# EAGLE board P32 Main (EAGLE 5.06)
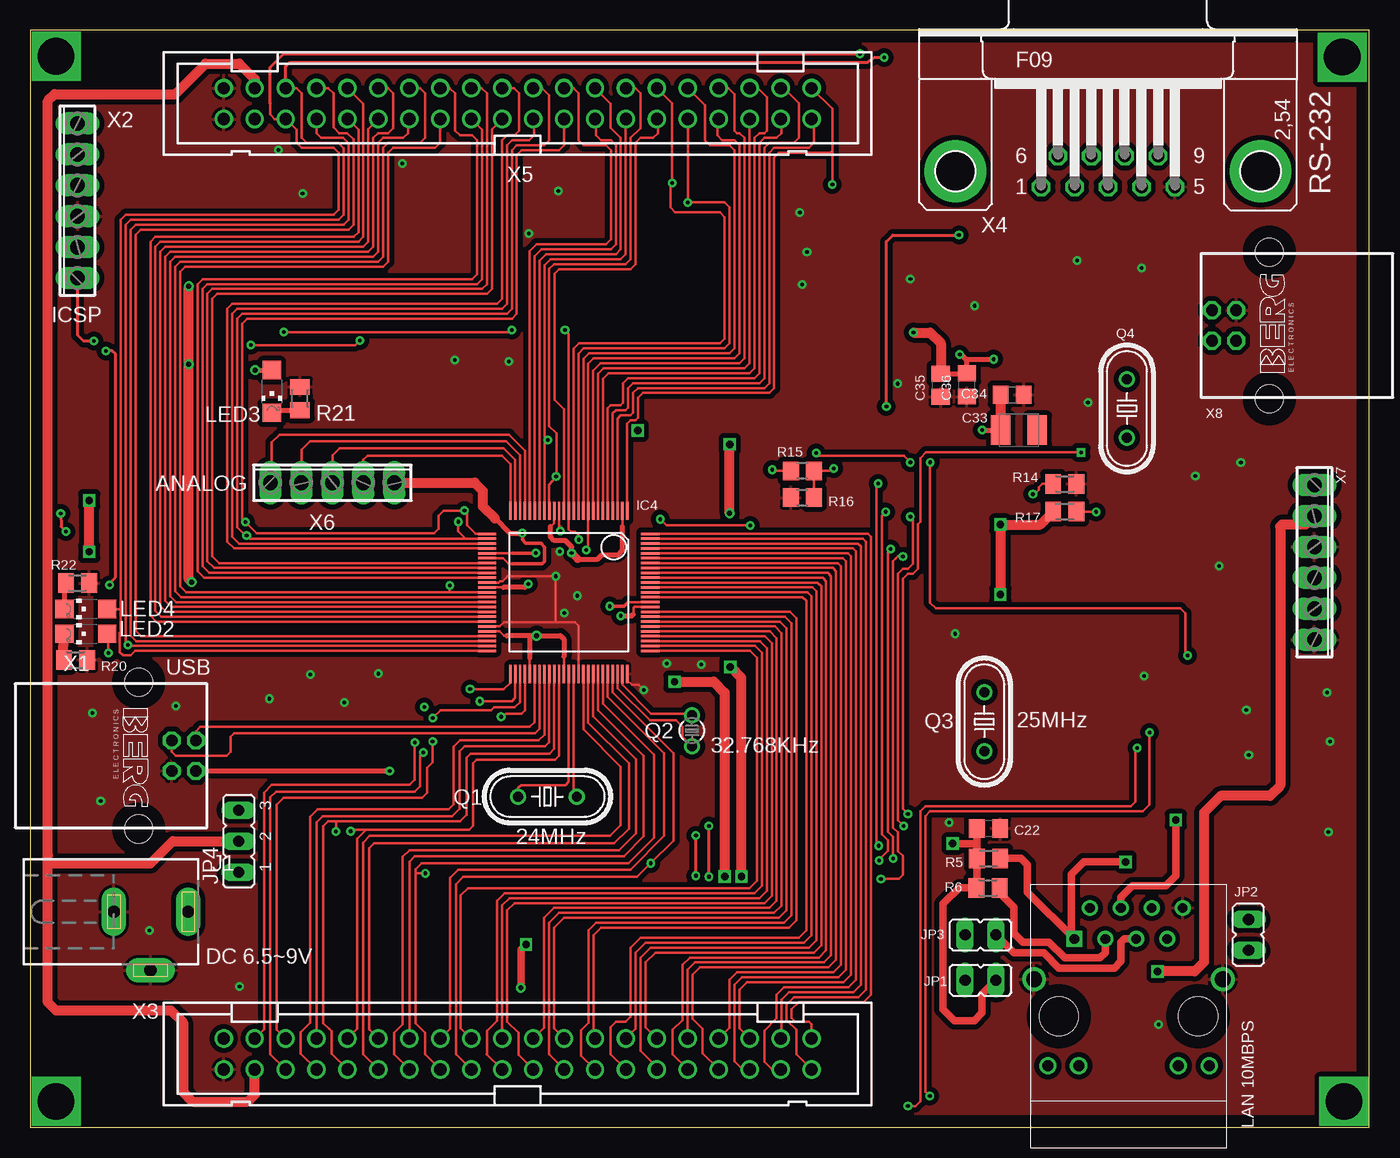
[diagram p0: board, top side]
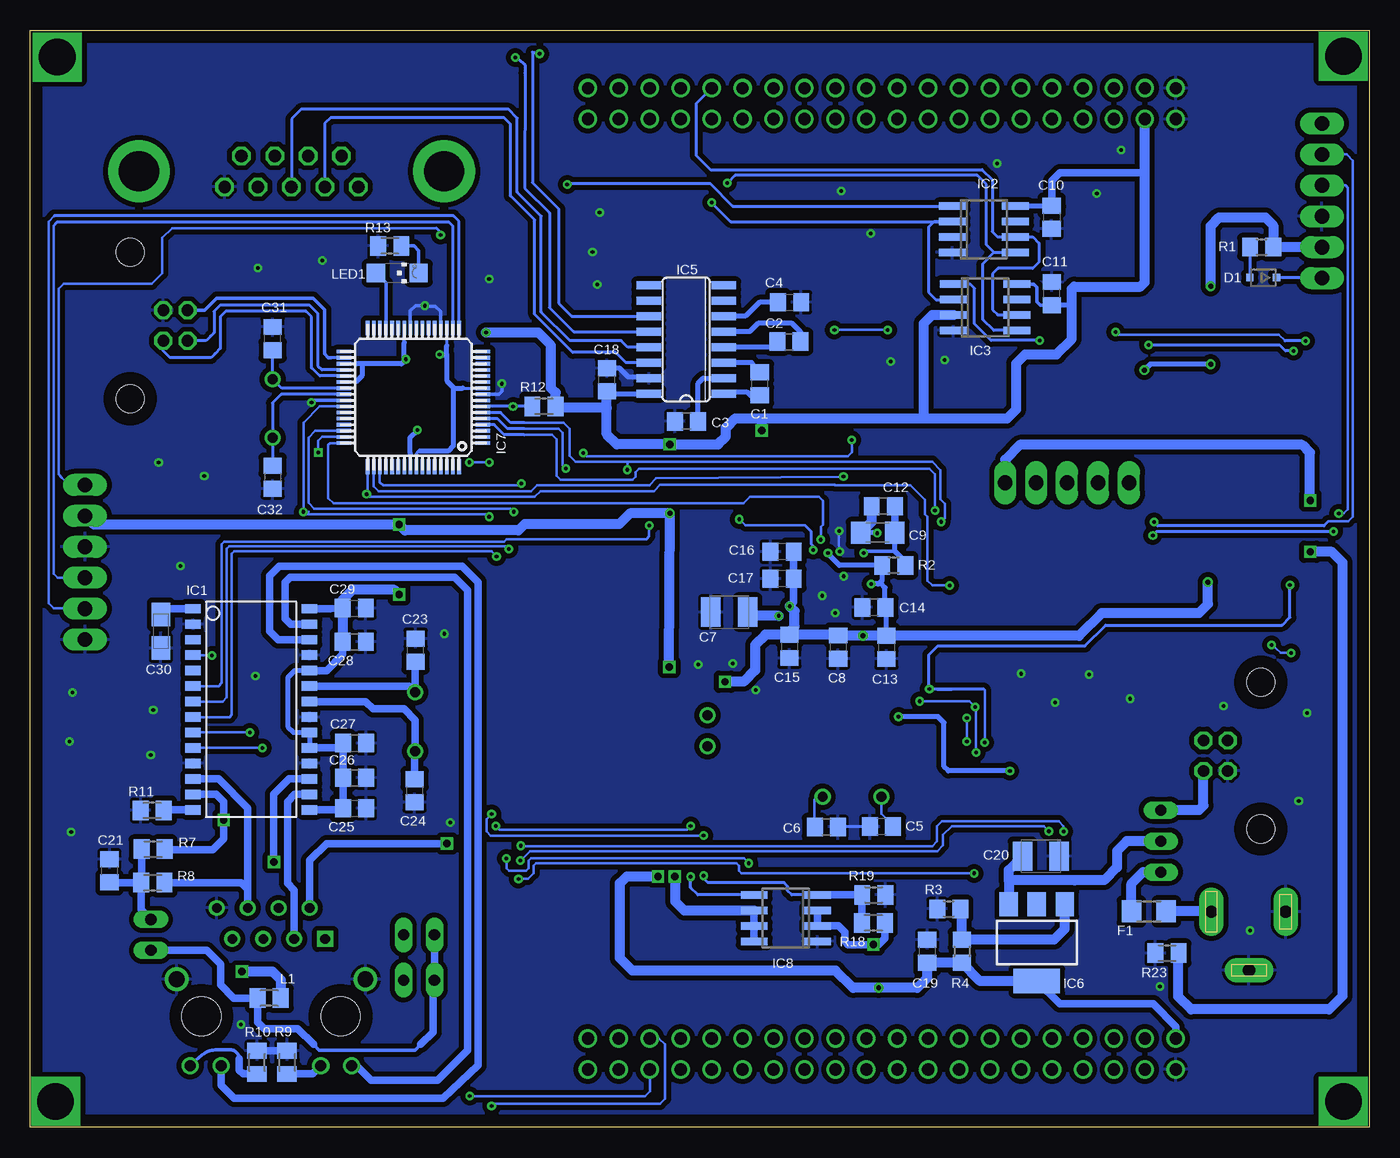
[diagram p1: board, bottom side, seen from below]

Size 109.9 x 90 mm. Coordinates in mm from the lower left corner, seen from the top.
Outline: 0,0 109.9,0 109.9,90 0,90 0,0
Copper layers (1*16): Top 0.035mm / dielectric 1.5mm / Bottom 0.035mm
Design rules "default *": minimum track width 7mil, minimum drill 0.3mm, track to track 7mil, track to pad 7mil, pad to pad 7mil, via to via 7mil, smd to smd 7mil, copper to edge 40mil, drill to drill 8mil, minimum pad ring 10mil, minimum via ring 8mil, stop-mask expansion 4mil, vias tented up to drill 0mil, thermal gap 10mil

## Footprints (pad centres in the part's own frame; a part is rotated, then mirrored left to right if it is on the bottom)
C0805 = smd 1.3 x 1.5: 1 -0.95,0; 2 0.95,0
SMC_B = smd 1.6 x 2.4: + -1.5,0; - 1.5,0
C1206 = smd 1.6 x 1.8: 1 -1.4,0; 2 1.4,0
A/3216-18R = smd 1.95 x 1.5: + 1.375,0; - -1.375,0
SOD323-R = smd 0.6 x 0.6: A 1.1,0; C -1.1,0
R1206 = smd 1.6 x 1.803: 1 -1.422,0; 2 1.422,0
SO28W = smd 0.762 x 1.27: 1 -7.62,-4.78; 2 -6.35,-4.78; 3 -5.08,-4.78; 4 -3.81,-4.78; 5 -2.54,-4.78; 6 -1.27,-4.78; 7 0,-4.78; 8 1.27,-4.78; 9 2.54,-4.78; 10 3.81,-4.78; 11 5.08,-4.78; 12 6.35,-4.78; 13 7.62,-4.78; 14 8.89,-4.78; 15 8.89,4.78; 16 7.62,4.78; 17 6.35,4.78; 18 5.08,4.78; 19 3.81,4.78; 20 2.54,4.78; 21 1.27,4.78; 22 0,4.78; 23 -1.27,4.78; 24 -2.54,4.78; 25 -3.81,4.78; 26 -5.08,4.78; 27 -6.35,4.78; 28 -7.62,4.78
SO-08 = smd 0.6 x 2.2: 1 -1.905,-2.6; 2 -0.635,-2.6; 3 0.635,-2.6; 4 1.905,-2.6; 5 1.905,2.6; 6 0.635,2.6; 7 -0.635,2.6; 8 -1.905,2.6
UBW32_TQFP100 = smd 0.2 x 1.5: 1 -4.8,-6.7; 2 -4.4,-6.7; 3 -4,-6.7; 4 -3.6,-6.7; 5 -3.2,-6.7; 6 -2.8,-6.7; 7 -2.4,-6.7; 8 -2,-6.7; 9 -1.6,-6.7; 10 -1.2,-6.7; 11 -0.8,-6.7; 12 -0.4,-6.7; 13 0,-6.7; 14 0.4,-6.7; 15 0.8,-6.7; 16 1.2,-6.7; 17 1.6,-6.7; 18 2,-6.7; 19 2.4,-6.7; 20 2.8,-6.7; 21 3.2,-6.7; 22 3.6,-6.7; 23 4,-6.7; 24 4.4,-6.7; 25 4.8,-6.7; 51 4.8,6.7; 52 4.4,6.7; 53 4,6.7; 54 3.6,6.7; 55 3.2,6.7; 56 2.8,6.7; 57 2.4,6.7; 58 2,6.7; 59 1.6,6.7; 60 1.2,6.7; 61 0.8,6.7; 62 0.4,6.7; 63 0,6.7; 64 -0.4,6.7; 65 -0.8,6.7; 66 -1.2,6.7; 67 -1.6,6.7; 68 -2,6.7; 69 -2.4,6.7; 70 -2.8,6.7; 71 -3.2,6.7; 72 -3.6,6.7; 73 -4,6.7; 74 -4.4,6.7; 75 -4.8,6.7 | smd 1.5 x 0.2: 26 6.7,-4.8; 27 6.7,-4.4; 28 6.7,-4; 29 6.7,-3.6; 30 6.7,-3.2; 31 6.7,-2.8; 32 6.7,-2.4; 33 6.7,-2; 34 6.7,-1.6; 35 6.7,-1.2; 36 6.7,-0.8; 37 6.7,-0.4; 38 6.7,0; 39 6.7,0.4; 40 6.7,0.8; 41 6.7,1.2; 42 6.7,1.6; 43 6.7,2; 44 6.7,2.4; 45 6.7,2.8; 46 6.7,3.2; 47 6.7,3.6; 48 6.7,4; 49 6.7,4.4; 50 6.7,4.8; 76 -6.7,4.8; 77 -6.7,4.4; 78 -6.7,4; 79 -6.7,3.6; 80 -6.7,3.2; 81 -6.7,2.8; 82 -6.7,2.4; 83 -6.7,2; 84 -6.7,1.6; 85 -6.7,1.2; 86 -6.7,0.8; 87 -6.7,0.4; 88 -6.7,0; 89 -6.7,-0.4; 90 -6.7,-0.8; 91 -6.7,-1.2; 92 -6.7,-1.6; 93 -6.7,-2; 94 -6.7,-2.4; 95 -6.7,-2.8; 96 -6.7,-3.2; 97 -6.7,-3.6; 98 -6.7,-4; 99 -6.7,-4.4; 100 -6.7,-4.8
SO16 = smd 0.66 x 2.032: 1 -4.445,-3.073; 2 -3.175,-3.073; 3 -1.905,-3.073; 4 -0.635,-3.073; 5 0.635,-3.073; 6 1.905,-3.073; 7 3.175,-3.073; 8 4.445,-3.073; 9 4.445,3.073; 10 3.175,3.073; 11 1.905,3.073; 12 0.635,3.073; 13 -0.635,3.073; 14 -1.905,3.073; 15 -3.175,3.073; 16 -4.445,3.073
SOT223 = smd 1.5 x 2: 1 -2.3,-3.15; 2 0,-3.15; 3 2.3,-3.15 | smd 3.8 x 2: 4 0,3.15
TQFP64-10X10 = smd 1.2 x 0.3: 1 -5.7,3.75; 2 -5.7,3.25; 3 -5.7,2.75; 4 -5.7,2.25; 5 -5.7,1.75; 6 -5.7,1.25; 7 -5.7,0.75; 8 -5.7,0.25; 9 -5.7,-0.25; 10 -5.7,-0.75; 11 -5.7,-1.25; 12 -5.7,-1.75; 13 -5.7,-2.25; 14 -5.7,-2.75; 15 -5.7,-3.25; 16 -5.7,-3.75; 33 5.7,-3.75; 34 5.7,-3.25; 35 5.7,-2.75; 36 5.7,-2.25; 37 5.7,-1.75; 38 5.7,-1.25; 39 5.7,-0.75; 40 5.7,-0.25; 41 5.7,0.25; 42 5.7,0.75; 43 5.7,1.25; 44 5.7,1.75; 45 5.7,2.25; 46 5.7,2.75; 47 5.7,3.25; 48 5.7,3.75 | smd 0.3 x 1.2: 17 -3.75,-5.7; 18 -3.25,-5.7; 19 -2.75,-5.7; 20 -2.25,-5.7; 21 -1.75,-5.7; 22 -1.25,-5.7; 23 -0.75,-5.7; 24 -0.25,-5.7; 25 0.25,-5.7; 26 0.75,-5.7; 27 1.25,-5.7; 28 1.75,-5.7; 29 2.25,-5.7; 30 2.75,-5.7; 31 3.25,-5.7; 32 3.75,-5.7; 49 3.75,5.7; 50 3.25,5.7; 51 2.75,5.7; 52 2.25,5.7; 53 1.75,5.7; 54 1.25,5.7; 55 0.75,5.7; 56 0.25,5.7; 57 -0.25,5.7; 58 -0.75,5.7; 59 -1.25,5.7; 60 -1.75,5.7; 61 -2.25,5.7; 62 -2.75,5.7; 63 -3.25,5.7; 64 -3.75,5.7
DCJ0202 = drill 1 pad 2 long: 1 0,3.1; 2 4.8,0; 3 0,-3
JP1 = drill 0.914 long: 1 0,-1.27; 2 0,1.27
JP2 = drill 0.914 long: 1 -2.54,0; 2 0,0; 3 2.54,0
M0805 = smd 1.3 x 1.6: 1 -0.95,0; 2 0.95,0
CHIPLED_1206 = smd 1.5 x 1.5: A 0,-1.75; C 0,1.75
HC49/S = drill 0.813 round: 1 -2.413,0; 2 2.413,0
TC26V = drill 0.813 round: 1 -1.27,0; 2 1.27,0
R0805 = smd 1.3 x 1.5: 1 -0.95,0; 2 0.95,0
PN61729 = drill 0.95 octagon: 1 1.25,4.71; 2 -1.25,4.71; 3 -1.25,2.71; 4 1.25,2.71 | hole 2.3: -6.02,0; 6.02,0
6POL254 = drill 1.2 pad 1.778 long: 1 -6.35,0; 2 -3.81,0; 3 -1.27,0; 4 1.27,0; 5 3.81,0; 6 6.35,0
PAK100/2500-40 = drill 1 pad 1.422 round: 1 -24.13,-1.27; 2 -24.13,1.27; 3 -21.59,-1.27; 4 -21.59,1.27; 5 -19.05,-1.27; 6 -19.05,1.27; 7 -16.51,-1.27; 8 -16.51,1.27; 9 -13.97,-1.27; 10 -13.97,1.27; 11 -11.43,-1.27; 12 -11.43,1.27; 13 -8.89,-1.27; 14 -8.89,1.27; 15 -6.35,-1.27; 16 -6.35,1.27; 17 -3.81,-1.27; 18 -3.81,1.27; 19 -1.27,-1.27; 20 -1.27,1.27; 21 1.27,-1.27; 22 1.27,1.27; 23 3.81,-1.27; 24 3.81,1.27; 25 6.35,-1.27; 26 6.35,1.27; 27 8.89,-1.27; 28 8.89,1.27; 29 11.43,-1.27; 30 11.43,1.27; 31 13.97,-1.27; 32 13.97,1.27; 33 16.51,-1.27; 34 16.51,1.27; 35 19.05,-1.27; 36 19.05,1.27; 37 21.59,-1.27; 38 21.59,1.27; 39 24.13,-1.27; 40 24.13,1.27
F09HP = drill 1.016 octagon: 1 -5.486,-1.27; 2 -2.743,-1.27; 3 0,-1.27; 4 2.743,-1.27; 5 5.486,-1.27; 6 -4.115,1.27; 7 -1.372,1.27; 8 1.372,1.27; 9 4.115,1.27 | drill 3.302 pad 5.08 round: G1 -12.522,0; G2 12.522,0
5POL254 = drill 1.2 long: 1 -5.08,0; 2 -2.54,0; 3 0,0; 4 2.54,0; 5 5.08,0
MAGJACK = drill 0.8 square: 1 -4.445,6.35 | drill 0.8 round: 2 -3.175,8.89; 3 -1.905,6.35; 4 -0.635,8.89; 5 0.635,6.35; 6 1.905,8.89; 7 3.175,6.35; 8 4.445,8.89 | drill 1.3 round: GND1 -7.747,3.048; GND2 7.747,3.048 | drill 0.9 round: LED1.1 -6.629,-4.064; LED1.2 -4.089,-4.064; LED2.1 4.089,-4.064; LED2.2 6.629,-4.064 | hole 3.2: -5.715,0; 5.715,0

## Placement (x,y rotation side)
C1  0.1uF  [C0805]  50.01,61.01 90 bottom
C2  0.1uF  [C0805]  47.62,64.47 0 bottom
C3  0.1uF  [C0805]  56.03,57.91 180 bottom
C4  0.1uF  [C0805]  47.57,67.69 0 bottom
C5  18pF  [C0805]  40.03,24.66 180 bottom
C6  18pF  [C0805]  44.55,24.64 0 bottom
C7  10uF  [SMC_B]  52.53,42.27 180 bottom
C8  0.1uF  [C0805]  43.59,39.4 270 bottom
C9  47uF  [C1206]  40.34,48.77 180 bottom
C10  0.1uF  [C0805]  26.06,74.68 270 bottom
C11  0.1uF  [C0805]  26.04,68.4 90 bottom
C12  0.01uF  [C0805]  39.88,50.95 180 bottom
C13  1uF  [C0805]  39.62,39.37 270 bottom
C14  0.01uF  [C0805]  40.64,42.65 180 bottom
C15  1uF  [C0805]  47.57,39.45 270 bottom
C16  0.1uF  [C0805]  48.18,47.22 180 bottom
C17  0.01uF  [C0805]  48.18,45.01 180 bottom
C18  0.1uF  [C0805]  62.56,61.34 90 bottom
C19  1uF  [C0805]  36.27,14.43 90 bottom
C20  10uF  [SMC_B]  26.95,22.23 0 bottom
C21  0.1uF  [C0805]  103.4,21.03 90 bottom
C22  0.1uF  [C0805]  78.66,24.51 0 top
C23  18pF  [C0805]  78.28,39.14 90 bottom
C24  18pF  [C0805]  78.36,27.61 270 bottom
C25  0.1uF  [C0805]  83.29,26.16 0 bottom
C26  0.1uF  [C0805]  83.29,28.68 0 bottom
C27  0.1uF  [C0805]  83.29,31.52 0 bottom
C28  0.1uF  [C0805]  83.31,39.83 0 bottom
C29  0.1uF  [C0805]  83.31,42.6 0 bottom
C30  10uF  [A/3216-18R]  99.19,40.69 90 bottom
C31  18pF  [C0805]  90.02,64.72 90 bottom
C32  18pF  [C0805]  90.02,53.34 270 bottom
C33  10uF  [SMC_B]  81.15,57.2 0 top
C34  0.1uF  [C0805]  80.59,60.1 0 top
C35  0.1uF  [C0805]  74.73,60.88 90 top
C36  0.1uF  [C0805]  76.89,60.91 90 top
D1  1N4148 SOD323  [SOD323-R]  8.69,69.72 180 bottom
F1  MF-NSMF200 Fuse  [R1206]  18.08,17.7 180 bottom
IC1  ENC28J60SO  [SO28W]  91.77,34.92 270 bottom
IC2  23A256  [SO-08]  31.62,73.69 270 bottom
IC3  25AA256  [SO-08]  31.52,67.28 270 bottom
IC4  PIC32MX460F512L  [UBW32_TQFP100]  44.2,43.89 180 top
IC5  MAX3232CSE  [SO16]  56.06,64.64 90 bottom
IC6  LM317MBSTT3  [SOT223]  27.28,15.14 180 bottom
IC7  PIC32MX440F256H  [TQFP64-10X10]  78.46,59.89 180 bottom
IC8  TPS2051BD  [SO-08]  47.88,17.14 90 bottom
J1  DCJ0202  [DCJ0202]  9.86,17.68 270 top
JP1  JUMPER  [JP1]  78,12.06 90 top
JP2  JUMPER  [JP1]  100,15.77 180 top
JP3  JUMPER  [JP1]  78,15.77 90 top
JP4  [JP2]  17.09,23.47 90 top
L1  4.7uH  [M0805]  90.3,10.59 0 bottom
LED1  [CHIPLED_1206]  79.78,70.1 270 bottom
LED2  [CHIPLED_1206]  4.55,40.49 90 top
LED3  [CHIPLED_1206]  19.81,60.38 180 top
LED4  [CHIPLED_1206]  4.55,42.52 90 top
Q1  24MHz  [HC49/S]  42.44,27.13 0 top
Q2  32.768KHz  [TC26V]  54.31,32.54 90 top
Q3  25MHz  [HC49/S]  78.31,33.27 270 top
Q4  8MHz  [HC49/S]  90.02,58.98 270 top
R1  10K  [R0805]  8.81,72.24 0 bottom
R2  2E  [R0805]  39.01,46.1 180 bottom
R3  5K  [R0805]  34.49,17.91 0 bottom
R4  240E  [R0805]  33.43,14.43 270 bottom
R5  49.9E  [M0805]  78.66,22.05 180 top
R6  49.9E  [M0805]  78.61,19.63 180 top
R7  49.9E  [M0805]  99.82,22.81 180 bottom
R8  49.9E  [M0805]  99.85,20.07 180 bottom
R9  150R  [M0805]  88.82,5.31 90 bottom
R10  150R  [M0805]  91.29,5.31 270 bottom
R11  [M0805]  99.9,25.98 0 bottom
R12  4K7  [M0805]  67.74,59.16 0 bottom
R13  330E  [M0805]  80.39,72.31 0 bottom
R14  4K7  [M0805]  84.91,52.78 180 top
R15  240E  [R0805]  63.37,53.85 180 top
R16  240E  [R0805]  63.37,51.66 0 top
R17  1K  [M0805]  84.91,50.52 180 top
R18  100K  [M0805]  40.69,16.76 0 bottom
R19  100K  [M0805]  40.67,19.05 180 bottom
R20  330E  [M0805]  3.71,38.35 180 top
R21  330E  [M0805]  22.12,59.79 270 top
R22  330E  [M0805]  3.86,44.65 180 top
R23  0E  [M0805]  16.59,14.27 180 bottom
X1  [PN61729]  8.89,30.48 270 top
X2  [6POL254]  3.86,76.02 90 top
X3  2540-  [PAK100/2500-40]  40,6 0 top
X4  DB-9  [F09HP]  88.47,78.44 0 top
X5  2540-  [PAK100/2500-40]  40,84 0 top
X6  [5POL254]  24.79,52.88 0 top
X7  [6POL254]  105.41,46.35 270 top
X8  [PN61729]  101.7,65.79 90 top
X9  MAGJACK  [MAGJACK]  90.14,9.09 0 top

## Library data of the parts
C1-C36 F1 L1 R1-R11 R15 R16 = rcl
D1 = diode
IC1 IC7 = microchip-6
IC2-IC4 = microchip
IC5 = maxim
IC6 = v-reg
IC8 = LL-Eagle Library
J1 = con-jack
JP1-JP4 = jumper
LED1-LED4 = led
Q1-Q4 = crystal
R12-R14 R17-R23 = resistor
X1 X8 = con-berg
X2 X6 X7 = con-phoenix-254
X3 X5 = con-3m
X4 = con-subd
X9 = magjacksmalldrill

## Nets
#CPU-ON: IC7.47 IC8.4 R18.1 R19.2
#DBG-MCLR: IC7.7 R12.1 X7.1
#PIC32-MCLR: D1.C IC4.13 IC7.48 X2.1
#SYS-OC: IC7.42 IC8.5 R17.1
+3.3V: C10.1 C11.1 C18.1 C19.1 C25.1 C26.1 C27.1 C28.1 C29.1 C35.2 C36.2 IC1.15 IC1.19 IC1.20 IC1.24 IC1.28 IC2.8 IC3.3 IC3.8 IC5.16 IC6.4 IC7.10 IC7.19 IC7.26 IC7.35 IC7.38 IC7.57 IC8.2 IC8.3 L1.2 R4.2 R12.2 R17.2 R18.2 X3.2 X5.3 X7.2
+5V: C20.+ IC6.3 JP4.2 X3.3 X5.4
AGND: C9.2 C12.2 IC4.31 R23.1 X6.5
ANALOG-1: IC4.25 X6.4
ANALOG-2: IC4.24 X6.3
ANALOG-3: IC4.23 X6.2
ANALOG-4: IC4.22 X6.1
AVDD: C9.1 C12.1 IC4.30 R2.1
DBG-PGC: IC7.17 X7.5
DBG-PGD: IC7.18 X7.4
DBG-SDO: IC7.5 R15.1 R16.2
ETH-CS#: IC1.9 IC4.95 X3.35
ETH-INT#: IC1.4 IC4.18 X5.27
ETH-RST#: IC1.10 IC4.96 X3.36
GND: C3.2 C4.2 C5.2 C6.2 C7.- C8.2 C10.2 C11.2 C13.2 C14.2 C15.2 C16.2 C17.2 C18.2 C19.2 C20.- C21.2 C22.2 C23.2 C24.2 C25.2 C26.2 C27.2 C28.2 C29.2 C30.- C31.2 C32.2 C34.2 C35.1 C36.1 IC1.2 IC1.11 IC1.18 IC1.21 IC1.25 IC2.4 IC3.4 IC4.15 IC4.36 IC4.45 IC4.65 IC4.75 IC5.15 IC7.9 IC7.20 IC7.25 IC7.41 IC8.1 J1.2 J1.3 R3.1 R9.2 R10.1 R11.1 R13.1 R14.1 R16.1 R19.1 R20.1 R21.1 R22.1 R23.2 X1.4 X2.3 X3.1 X4.5 X5.1 X5.2 X7.3 X7.6 X8.4 X9.8 X9.GND1 X9.GND2
LEDA: IC1.27 X9.LED1.1
LEDB: IC1.26 X9.LED2.1
N$1: D1.A R1.1
N$2: C3.1 IC5.2
N$5: C4.1 IC5.6
N$6: C1.1 IC5.1
N$7: C1.2 IC5.3
N$9: C2.1 IC5.4
N$10: C2.2 IC5.5
N$12: IC6.1 R3.2 R4.1
N$13: IC5.14 X4.2
N$14: IC5.13 X4.3
N$15: C22.1 JP1.1 R5.2 R6.2 X9.2
N$16: IC7.34 X8.1
N$17: F1.1 J1.1
N$18: JP3.1 X9.5
N$19: C24.1 IC1.22 Q3.2
N$20: C21.1 JP2.1 R7.2 R8.2
N$21: C23.1 IC1.23 Q3.1
N$22: IC1.14 R11.2
N$23: C30.+ IC1.1
N$24: R9.1 X9.LED1.2
N$25: R10.2 X9.LED2.2
N$26: JP1.2 JP2.2 JP3.2 L1.1
N$27: IC7.29 LED1.A
N$28: LED1.C R13.2
N$29: IC7.36 X8.2
N$30: IC7.37 X8.3
N$31: C32.1 IC7.40 Q4.2
N$32: C31.1 IC7.39 Q4.1
N$33: C33.+ C34.1 IC7.56
N$34: C33.-
N$35: F1.2 JP4.1
N$36: LED2.C R20.2
N$37: LED3.C R21.2
N$38: LED4.C R22.2
N$90: IC4.74 Q2.2
N$91: IC4.73 Q2.1
N$100: C6.1 IC4.64 Q1.2
N$101: C5.1 IC4.63 Q1.1
P32_33V: C8.1 C13.1 C14.1 C15.1 C16.1 C17.1 IC4.2 IC4.16 IC4.37 IC4.46 IC4.55 IC4.62 IC4.86 IC8.6 IC8.7 IC8.8 LED3.A R1.2 R2.2 X2.2
PIC32-PGC2: IC4.26 IC7.4 X2.5 X5.23
PIC32-PGD2: IC4.27 IC7.6 R15.2 X2.4 X5.22
RA6: IC4.91 X3.31
RA7: IC4.92 X3.32
RA9: IC4.28 X5.21
RA10: IC4.29 X5.20
RB4: IC4.21 X5.24
RB5: IC4.20 X5.25
RB8: IC4.32 X5.19
RB9: IC4.33 X5.18
RB10: IC4.34 X5.17
RB11: IC4.35 X5.16
RB12: IC4.41 X5.12
RB13: IC4.42 X5.11
RB14: IC4.43 X5.10
RB15: IC4.44 X5.9
RC1: IC4.6 X5.36
RC2: IC4.7 X5.35
RC3: IC4.8 X5.34
RD1: IC4.76 X3.18
RD2: IC4.77 X3.19
RD3: IC4.78 X3.20
RD4: IC4.81 X3.23
RD5: IC4.82 X3.24
RD6: IC4.83 X3.25
RD7: IC4.84 X3.26
RD8: IC4.68 X3.13
RD9: IC4.69 X3.14
RD11: IC4.71 X3.16
RD12: IC4.79 X3.21
RD13: IC4.80 X3.22
RD14: IC4.47 X5.8
RD15: IC4.48 X5.7
RE0: IC4.93 X3.33
RE1: IC4.94 X3.34
RE2: IC4.98 X3.38
RE3: IC4.99 X3.39
RE4: IC4.100 X3.40
RE5: IC4.3 X5.39
RE6: IC4.4 X5.38
RE7: IC4.5 X5.37
RE9: IC4.19 X5.26
RF0: IC4.87 X3.27
RF1: IC4.88 X3.28
RF3: IC3.1 IC4.51 X3.4
RF4: IC4.49 IC5.12 LED2.A X5.6
RF5: IC4.50 IC5.11 LED4.A X5.5
RF12: IC4.40 X5.13
RF13: IC4.39 X5.14
RG0: IC4.90 X3.30
RG1: IC4.89 X3.29
RG9: IC4.14 X5.29
RG13: IC4.97 X3.37
RG15: IC2.1 IC4.1 X5.40
SCK1: IC1.8 IC4.70 X3.15
SCK2: IC2.6 IC3.6 IC4.10 X5.32
SCL1: IC4.66 X3.11
SCL2: IC4.58 X3.7
SDA1: IC4.67 X3.12
SDA2: IC4.59 X3.8
SDI1: IC1.6 IC4.9 X5.33
SDI2: IC2.2 IC3.2 IC4.11 X5.31
SDO1: IC1.7 IC4.72 X3.17
SDO2: IC2.5 IC3.5 IC4.12 X5.30
TCK: IC4.38 IC7.49 R14.2 X5.15
TDI: IC4.60 IC7.51 X3.9
TDO: IC4.61 IC7.46 X3.10
TMS: IC4.17 IC7.50 X5.28
TPIN+: IC1.13 R7.1 X9.4
TPIN-: IC1.12 R8.1 X9.6
TPOUT+: IC1.17 R5.1 X9.1
TPOUT-: IC1.16 R6.1 X9.3
U1RX: IC4.52 X3.5
U1TX: IC4.53 X3.6
USBDM: IC4.56 X1.2
USBDP: IC4.57 X1.3
VBUS: IC4.54 JP4.3 X1.1
VDDCORE: C7.+ IC4.85

## Tracks (layer width: path | path; a pad name or v marks a point on that pad's centre or on a via)
#CPU-ON  (via drill 0.3)
  Top 0.203: v72.03,25.7 71.63,26.11 71.63,45.01 72.03,45.41 72.44,45.41 72.85,45.82 72.85,49.48 73.05,49.68 73.05,54.89 73.53,55.37 v86.26,55.37
  Top 0.254: v54.63,20.62 v54.63,23.93
  Bottom 0.203: IC7.47 85.95,56.64 86.26,56.34 v86.26,55.37 | v54.63,23.93 72.11,23.93 72.47,24.28 72.47,25.27 v72.03,25.7
  Bottom 0.254: IC8.4 47.4,19.05 47.73,19.38 47.73,19.76 48.03,20.07 54.28,20.07 54.63,20.42 v54.63,20.62
  Bottom 0.61: R18.1 41.62,16.79 R19.2 IC8.4
#DBG-MCLR  (via drill 0.3)
  Top 0.229: v76.22,73.2 70.79,73.2 70.26,72.67 70.26,59.16 v70.27,59.14
  Bottom 0.203: X7.1 106.73,52.7 arc90 106.76,52.73 107.31,53.29 107.59,53.57 107.59,68.78 107.16,69.22 99.95,69.22 99.08,70.08 99.08,72.97 98.27,73.79 76.56,73.79
  Bottom 0.229: IC7.7 v70.27,59.14 68.88,59.14 R12.1 | v76.22,73.2 76.22,73.46 76.56,73.79
#PIC32-MCLR  (via drill 0.3)
  Top 0.203: v45.01,48.21 45.01,48.59 44.73,48.87 44.4,48.87 44.2,49.07 IC4.13 44.2,65.13 v43.89,65.43 | v20.8,65.25 39.34,65.25 v39.52,65.43
  Top 0.254: X2.1 3.86,65 4.34,64.52 v5.21,64.52
  Bottom 0.203: 6.88,64.52 7.39,65.02 20.57,65.02 v20.8,65.25 | v45.01,48.21 45.01,49.28 44.83,49.45 44.83,51.38 45.16,51.71 50.83,51.71 51.36,51.18 85.01,51.18 85.45,51.61 85.45,55.98 85.28,56.14 IC7.48 | v39.52,65.43 v43.89,65.43
  Bottom 0.254: X2.1 3.91,69.72 D1.C | v5.21,64.52 6.88,64.52
#SYS-OC  (via drill 0.3)
  Top 0.203: R17.1 85.89,50.49 v87.48,50.49 | v71.68,24.71 71.22,25.17 71.22,45.41 71.63,45.82 72.03,45.82 72.44,46.23 72.44,49.89 v72.24,50.09
  Top 0.254: v55.7,20.55 v55.7,24.71
  Bottom 0.203: IC7.42 86.14,59.14 87.48,57.81 v87.48,50.49 | v87.48,50.49 87.07,50.49 | v55.7,24.71 56.01,24.41 71.37,24.41 v71.68,24.71 | v72.24,50.09 72.44,50.29 87.27,50.29 v87.48,50.49
  Bottom 0.254: IC8.5 55.09,19.05 55.7,19.66 v55.7,20.55
+3.3V  (via drill 0.3, 0.4, 0.6)
  Top 0.406: 76.81,63.02 v79.07,63.02 | 76.81,63.02 76.89,62.94 C36.2 76.86,61.83 C35.2 | v76.3,63.4 76.43,63.4 76.81,63.02
  Top 0.61: v40.26,11.43 40.26,14.55 v40.69,14.99
  Top 0.813: v79.63,43.71 v79.63,49.45 82.89,49.45 R17.2 | v72.49,65.2 73.86,65.2 74.73,64.34 C35.2 | v92.53,12.78 95.58,12.78 96.34,13.54 96.34,25.81 97.71,27.18 101.75,27.18 102.59,28.02 102.59,49.3 102.74,49.45 104.7,49.45 X7.2 | v57.4,50.37 v57.4,56.03 | v58.37,20.57 58.37,36.85 v57.45,37.77
  Bottom 0.254: 75.72,64.14 75.71,64.14 IC7.19 | 75.16,60.71 arc-90 75.1,60.64 | 74.41,60.64 IC7.10 | 83.15,62.64 IC7.35 | 83.2,61.14 IC7.38 | IC7.57 78.21,55.19 arc90 77.93,55.47 | 79.21,64.38 IC7.26
  Bottom 0.305: C11.1 26.99,67.45 27.28,67.74 27.28,68.94 27.53,69.19 IC3.8
  Bottom 0.406: IC5.16 62.37,60.2 C18.1 | IC2.8 26.02,75.59 25.55,75.59 25.5,75.54 | R12.2 66.78,59.17 | 75.27,60.82 75.16,60.71 | 75.27,60.82 75.72,61.27 75.72,63.4 | 75.72,63.4 75.72,64.14 | 75.1,60.64 74.41,60.64 | 82.68,62.64 79.44,62.64 v79.07,63.02 79.21,63.16 79.21,64.38 | 82.68,62.64 83.15,62.64 | 83.2,61.14 82.68,61.67 82.68,62.64 | 77.93,55.47 75.62,55.47 75.18,55.91 75.18,60.73 75.27,60.82 | v76.3,63.4 75.72,63.4 | C11.1 24.45,67.45 24.41,67.49 | IC1.19 IC1.20 88.29,32.38 88.77,32.87 88.77,36.88 88.19,37.47 IC1.24
  Bottom 0.61: IC1.19 84.75,31.11 C27.1 C26.1 C25.1 84.36,26.04 IC1.15 87.02,26 | C28.1 84.26,38.8 85.6,37.47 IC1.24 | IC6.4 25.4,10.11 17.73,10.11 15.87,8.25 X3.2 | IC1.28 85.31,42.55 C29.1 | IC8.3 IC8.2 43.56,16.51 43.03,15.98 43.03,15.24 42.77,14.99 v40.69,14.99 40.26,14.99 39.74,15.5 R18.2 | 26.02,75.59 26.02,77.68 25.4,78.31 18.43,78.31 18.41,78.28
  Bottom 0.813: IC6.4 31.94,11.99 R4.2 C19.1 36.3,13.45 36.3,12.22 37.08,11.43 v40.26,11.43 42.37,11.43 43.79,12.85 60.48,12.85 61.49,13.87 61.49,20.02 60.94,20.57 v58.37,20.57 | X5.3 18.41,78.28 18.41,70.82 18.41,70.81 18.41,69.32 18.76,68.97 24.23,68.97 24.41,68.8 24.41,67.49 24.41,64.67 25.65,63.42 28.22,63.42 28.96,62.69 28.96,58.9 29.69,58.17 36.3,58.17 | 26.02,75.59 C10.1 | IC3.3 35.87,66.65 36.55,65.96 36.55,58.42 36.3,58.17 | 49.78,58.17 36.3,58.17 | v49.86,57.17 49.86,58.09 49.78,58.17 | 49.78,58.17 52.05,58.17 52.81,57.4 52.81,56.67 53.44,56.03 v57.4,56.03 61.75,56.03 62.59,56.87 62.59,59.03 | 62.59,59.03 62.59,60.37 C18.1 | v79.63,43.71 80.01,44.09 83.46,44.09 84.26,43.3 C29.1 C28.1 | X7.2 104.7,49.45 v79.63,49.45 79.15,48.97 69.83,48.97 69.32,49.48 61.57,49.48 60.68,50.37 v57.4,50.37 v57.45,37.77 | R12.2 66.67,59.03 62.59,59.03 | 66.78,59.17 66.78,60.27 67.16,60.66 67.16,64.16 68.2,65.2 v72.49,65.2 | L1.2 89.35,12.08 90.04,12.78 v92.53,12.78
+5V
  Top 0.813: X5.4 18.41,86.01 17.14,87.27 14.38,87.27 11.89,84.78 1.98,84.78 1.42,84.23 1.42,22.3 | X3.3 18.41,2.66 17.83,2.08 13.34,2.08 12.52,2.9 12.52,8.59 11.53,9.58 2.08,9.58 1.42,10.24 1.42,21.51 | 1.42,21.51 1.42,22.3 | 1.42,22.3 1.45,22.33 | JP4.2 11.68,23.47 9.86,21.64 1.42,21.64 1.42,21.51
  Bottom 0.61: 24.13,20.27 24.16,20.24
  Bottom 0.813: C20.+ 29.58,21.09 29.58,20.24 | 29.58,20.24 IC6.3 | 24.16,20.24 29.58,20.24 | 24.13,20.27 21.74,20.27 20.7,21.31 20.7,22.66 19.89,23.47 JP4.2
AGND  (via drill 0.3, 0.6)
  Top 0.203: IC4.31 38.8,46.69 39.27,46.23 39.52,46.23
  Top 0.305: v40.39,48.74 40.39,48.18 40.66,47.9 41.91,47.9 42.22,47.6 42.22,46.46 41.99,46.23 39.52,46.23
  Top 0.406: 38.12,49.96 39.34,48.74 v40.39,48.74
  Top 0.813: 38.12,49.96 37.13,50.95 37.13,52.22 36.47,52.88 X6.5 | v4.83,47.22 v4.83,51.44
  Bottom 0.406: v40.39,48.74 40.36,48.77 C9.2
  Bottom 0.813: C12.2 40.83,49.67 C9.2 | X6.5 29.87,54.79 28.68,55.98 5.49,55.98 4.85,55.35 4.85,51.46 v4.83,51.44 | v4.83,47.22 3.05,47.22 2.16,46.33 2.16,10.77 3.28,9.65 14.61,9.65 15.67,10.72 15.67,14.24 R23.1
ANALOG-1
  Top 0.203: IC4.25 39.4,54.41 38.71,55.09 27.66,55.09 27.33,54.76 X6.4
ANALOG-2
  Top 0.203: IC4.24 39.8,54.77 38.84,55.73 25.38,55.73 24.79,55.14 X6.3
ANALOG-3
  Top 0.203: IC4.23 40.2,55.13 39.04,56.29 22.96,56.29 22.25,55.58 X6.2
ANALOG-4
  Top 0.203: IC4.22 40.6,55.52 39.29,56.82 20.45,56.82 19.81,56.19 19.81,52.98 X6.1
AVDD  (via drill 0.3)
  Top 0.203: IC4.30 39.52,47.09
  Top 0.305: 39.52,47.09 41.45,47.09 v41.48,47.12
  Bottom 0.305: 38.94,47.27 41.33,47.27 v41.48,47.12
  Bottom 0.406: C9.1 38.94,47.27 38.06,46.4 R2.1
  Bottom 0.61: C12.1 38.93,48.77 C9.1
DBG-PGC
  Bottom 0.203: 107.92,74.78 108.41,74.3 108.41,43 107.97,42.57 105.44,42.57 X7.5
  Bottom 0.229: 107.92,74.78 75.16,74.78 74.71,74.33 IC7.17
DBG-PGD
  Bottom 0.203: 107.72,74.24 108,73.97 108,45.41 107.67,45.09 X7.4
  Bottom 0.229: IC7.18 75.21,73.94 75.51,74.24 107.72,74.24
DBG-SDO  (via drill 0.3)
  Top 0.203: v65.94,54.05 65.73,53.85 R15.1 R16.2
  Bottom 0.203: 69.37,57.33 66.52,57.33 66.19,57 66.19,54.3 v65.94,54.05
  Bottom 0.229: IC7.5 71.55,58.14 70.74,57.33 69.37,57.33
ETH-CS#  (via drill 0.3)
  Top 0.203: IC4.95 66.69,46.69 66.95,46.43 66.95,12.9 66.34,12.29 58.42,12.29 57.81,11.68 57.81,5.38 58.47,4.73 X3.35 | v73.84,2.54 73.46,2.92 73.46,25.5 73.86,25.91 91.34,25.91 91.87,26.44 v91.87,32.38
  Bottom 0.203: X3.35 59.05,2.93 59.44,2.54 v73.84,2.54 | v91.87,32.38 IC1.9
ETH-INT#  (via drill 0.3)
  Top 0.203: v95,38.71 94.79,38.91 94.79,42.16 94.39,42.57 74.35,42.57 73.86,43.05 v73.86,54.56 | X5.27 48.87,82.71 48.87,71.63 48.46,71.22 42.7,71.22 42.2,70.72 42.2,56.66 v42.47,56.39 42.2,56.12 IC4.18 | v72.24,54.56 71.7,55.09 64.75,55.09 v64.52,55.32
  Bottom 0.203: v95,38.71 95.02,38.73 IC1.4 | v42.47,56.39 42.47,55.37 42.8,55.04 64.24,55.04 v64.52,55.32 | v72.24,54.56 v73.86,54.56
ETH-RST#  (via drill 0.3)
  Top 0.203: IC4.96 67.11,47.09 67.36,46.84 67.36,12.5 66.75,11.89 58.83,11.89 58.22,11.28 58.22,8.1 X3.36 | v72.03,1.73 72.64,1.73 73.05,2.13 73.05,25.91 73.46,26.31 90.32,26.31 90.73,26.72 90.73,30.99 v90.86,31.11
  Bottom 0.203: X3.36 58.27,7.27 57.81,6.81 57.81,2.34 58.22,1.93 71.83,1.93 v72.03,1.73 | v90.86,31.11 IC1.10
GND  (via drill 0.3)
  Top 0.203: IC4.45 38.53,41.09 38.89,41.45 43.31,41.45 | IC4.65 45,41.16 44.7,41.45 43.31,41.45 | 43.31,41.45 43.13,41.45 v43.13,45.21 39.17,45.21 38.76,44.81 38.56,44.81 38.44,44.69 IC4.36 | IC4.15 43.4,48.86 v43.51,48.92 | IC4.75 49,36.68 49.38,36.3 49.91,36.3 v50.34,35.87
  Bottom 0.203: v43.51,48.92 43.51,47.3 v43.46,47.24
  Bottom 0.254: C6.2 41.01,24.64 C5.2
  Bottom 0.305: IC7.20 76.21,66.94 76.66,67.39 77.37,67.39 v77.52,67.41 78.28,67.41 78.71,66.98 IC7.25 | IC7.41 86.64,59.64 v86.82,59.46 | IC7.9 71.43,60.14 71.2,60.38 v71.2,61.01
  Bottom 0.406: C18.2 61.55,62.29 60.81,61.54 59.21,61.54 IC5.15
  Bottom 0.61: R9.2 R10.1
  other vias: 34.85,62.97 43.33,76.83 39.27,62.84 40.92,73.33 92.61,8.41 75.41,24.99 30.53,79.1 22.35,76.61 20.35,80.19 43.81,42.19 44.88,43.61 55.07,37.97 52.25,38.05 106.45,35.66 106.68,31.65 106.55,24.23 99.82,34.24 100.03,30.53 97.59,46.05 91.44,37.03 75.92,40.49 85.93,71.12 91.21,70.51 95.63,53.44 99.36,54.53 72.24,69.6 63.75,71.83 63.35,69.16 63.17,75.06 28.55,37.21 25.78,34.85 22.99,37.13 19.61,35.15 17.17,11.53 5.11,33.99 9.78,16.13 5.77,26.77 11.94,34.57
  pour Top (isolate 0.406): 0.43,89.53 109.73,89.53 109.83,0.25 0.43,0.25
  pour Bottom (isolate 0.406): 0.25,89.74 109.7,89.74 109.7,0.2 0.25,0.2
LEDA
  Bottom 0.61: IC1.27 88.52,41.27 88.98,41.73 88.98,44.73 88.57,45.14 75.08,45.14 74.02,44.07 74.02,6.33 76.48,3.86 81.92,3.86 82.98,4.93 83.41,4.93 X9.LED1.1
LEDB
  Bottom 0.61: IC1.26 89.56,40.01 90.25,40.69 90.25,45.24 89.46,46.02 74.45,46.02 73.13,44.7 73.13,5.08 76.02,2.36 93.17,2.36 94.23,3.43 X9.LED2.1
N$1
  Bottom 0.254: R1.1 9.76,69.75 D1.A
N$2
  Bottom 0.406: C3.1 55.08,61.05 54.66,61.47 IC5.2
N$3  (via drill 3)
  other vias: 2.11,87.88
N$4  (via drill 3)
  other vias: 107.7,87.81
N$5
  Bottom 0.406: IC5.6 51.21,66.55 50.06,67.69 C4.1
N$6
  Bottom 0.406: C1.1 50.79,60.06 51.03,60.3 52.89,60.29 IC5.1
N$7
  Bottom 0.406: C1.2 50.69,62.74 IC5.3
N$8  (via drill 3)
  other vias: 107.82,2.11
N$9
  Bottom 0.406: C2.1 49.03,64.01 IC5.4
N$10
  Bottom 0.406: IC5.5 50.85,65.28 50.16,65.96 47.37,65.96 46.67,65.27 C2.2
N$11  (via drill 3)
  other vias: 2.11,2.11
N$12
  Bottom 0.61: 33.43,17.79 R3.2
  Bottom 0.813: 33.43,17.79 R4.1 25.87,15.38 24.98,16.27 IC6.1
N$13
  Bottom 0.254: IC5.14 61.01,62.74 61.85,63.58 65.38,63.58 68.5,66.7 68.5,74.45 70.48,76.43 70.48,82.32 70.99,82.83 85.27,82.83 85.72,82.37 X4.2
N$14
  Bottom 0.254: X4.3 88.44,77.19 88.44,82.75 87.68,83.52 70.64,83.52 69.93,82.8 69.93,76.73 67.96,74.77 67.96,66.89 65.61,64.54 61.39,64.54 60.86,64.01 IC5.13
N$15  (via drill 0.6)
  Top 0.61: 77.71,23.29 C22.1 | 77.71,23.29 R5.2 77.71,19.68 R6.2 76.25,19.63 74.93,18.31 74.93,9.65 75.84,8.74 77.5,8.74 78.13,9.37 78.13,10.92 JP1.1 | v75.72,23.27 77.69,23.27 77.71,23.29
  Bottom 0.61: X9.2 86.97,21.89 85.6,23.27 v75.72,23.27
N$16
  Bottom 0.254: IC7.34 85.22,63.14
  Bottom 0.305: X8.1 95.6,67.04 94.61,68.02 86.69,68.02 85.75,67.08 85.75,63.45 85.44,63.14 85.22,63.14
N$17
  Bottom 0.61: J1.1 12.98,17.7
  Bottom 0.813: 12.98,17.7 F1.1
N$18
  Top 0.61: JP3.1 80.75,14.3 83.19,14.3 84.43,13.06 88.98,13.06 89.53,13.61 89.53,15.16 89.81,15.44 X9.5
N$19
  Bottom 0.61: IC1.22 82.37,34.92 81.76,34.31 79.22,34.31 78.31,33.4 Q3.2 78.36,30.81 C24.1
N$20
  Bottom 0.61: R7.2 100.77,20.09 R8.2 | JP2.1 100.8,17.84 R8.2 | C21.1 103.39,20.07 R8.2
N$21
  Bottom 0.61: IC1.23 78.82,36.2 Q3.1 78.31,38.17 C23.1
N$22
  Bottom 0.61: IC1.14 98.9,26.04 R11.2
N$23
  Bottom 0.61: C30.+ 98.71,42.55 IC1.1
N$24
  Bottom 0.61: R9.1 86.73,4.36 X9.LED1.2
N$25
  Bottom 0.305: 92.76,5.61 arc-90 93.5,6.35 94.59,6.35 arc-32 95.58,6.07 arc-19 X9.LED2.2
  Bottom 0.61: 92.76,5.61 92.76,4.67 92.45,4.36 R10.2
N$26
  Bottom 0.305: 77.85,6.78 78.31,6.33 86.21,6.33 86.67,6.78
  Bottom 0.61: 86.67,6.78 87.96,8.08 90.7,8.08 91.25,8.62 L1.1 93.19,10.59 94.28,11.68 94.28,13.36 95.43,14.5 JP2.2 | 77.85,6.78 76.83,7.8 76.83,11.96 JP1.2 JP3.2
N$27
  Bottom 0.305: IC7.29 80.71,69.28 LED1.A
N$28
  Bottom 0.305: LED1.C 78.03,71.94 78.41,72.31 R13.2
N$29
  Bottom 0.229: IC7.36 85.97,62.14 86.28,62.46 86.28,66.75 87,67.46 94.31,67.46 94.82,66.95 94.82,65.2 95.1,64.92 95.48,64.54 X8.2
N$30
  Bottom 0.229: IC7.37 86.15,61.64 86.82,62.31 86.82,66.5 87.27,66.95 93.88,66.95 94.31,66.52 94.31,63.91 94.74,63.48 95.07,63.14 98.42,63.14 98.99,63.71 X8.3
N$31
  Bottom 0.254: C32.1 Q4.2 90.02,59.44 89.31,60.14 IC7.40
N$32
  Bottom 0.254: C31.1 Q4.1 89.27,60.64 IC7.39
N$33  (via drill 0.3)
  Top 0.406: v78.13,57.2 C33.+
  Top 0.813: C34.1 79.65,60.09 C33.+
  Bottom 0.229: IC7.56 78.72,55.3
  Bottom 0.406: 78.72,55.3 78.72,56.62 v78.13,57.2
N$35
  Bottom 0.813: JP4.1 18.57,20.93 19.51,19.99 F1.2 | F1.2
N$36
  Top 0.813: R20.2 2.62,38.49 LED2.C
N$37
  Top 0.406: LED3.C 20.03,58.84 R21.2
N$38
  Top 0.406: 2.67,44.41 2.8,44.28 LED4.C
  Top 0.813: 2.67,44.41 R22.2
N$90
  Top 0.203: Q2.2 54.18,33.93 50.95,33.93 48.59,36.3 48.59,37.13 48.6,37.14 IC4.74
N$91
  Top 0.203: Q2.1 53.52,32.05 53.52,32.87 53.01,33.38 50.85,33.38 48.2,36.03 IC4.73
N$100
  Top 0.203: Q1.2 44.6,27.39 IC4.64
  Bottom 0.203: Q1.2 45.26,27.13 45.52,26.87 45.52,24.65 C6.1
N$101
  Top 0.203: IC4.63 44.2,28.35 43.92,28.07 40.26,28.07 40.03,27.84 Q1.1
  Bottom 0.203: C5.1 39.01,24.66 arc-90 38.99,24.69 40.03,25.73 Q1.1
P32_33V  (via drill 0.3, 0.4, 0.6)
  Top 0.203: 39.1,40.32 38.88,40.32 38.51,40.69 IC4.46 | 41,38.81 41,38.86 | 49.05,43.08 49.06,43.09 IC4.86 | 41,38.48 IC4.55 | 43.79,38.61 IC4.62 | 38.83,44.29 IC4.37 | 48.6,49.31 IC4.2 | IC4.16 43,49.58 42.7,49.28 | IC4.46
  Top 0.305: v47.57,42.75 48.72,42.75 49.05,43.08
  Top 0.406: 39.1,40.32 39.12,40.34 v41.55,40.34 | v41.55,40.34 41,40.34 41,38.81 41,38.48 | v41.55,40.34 43.51,40.34 43.79,40.06 43.79,38.61 | 38.83,44.29 40.58,44.29 v40.87,44.58 | 48.6,49.31 48.6,47.33 48.26,46.99 46.94,46.99 46.56,46.61 44.91,46.61 | v18.44,62.13 LED3.A | v44.42,47.12 44.42,47.62 43.92,48.13 43,48.13 42.7,48.44 42.7,49.28
  Top 0.61: 44.91,46.61 44.91,46.63 v44.42,47.12
  Top 0.813: v57,20.57 57,35.66 56.11,36.55 v52.88,36.55 | v13.01,69.01 v13.01,62.61 13.01,44.96 v13.23,44.73
  Bottom 0.406: C13.1 39.1,40.32 | v41.55,40.34 41.62,40.34 | C13.1 39.66,40.28 | C8.1 43.64,40.4 | C13.1 39.62,42.58 C14.1 39.73,42.68 39.73,44.27 40.05,44.59 40.34,44.59 | v40.87,44.58 40.8,44.59 40.34,44.59 | v18.44,62.13 17.96,62.61 v13.01,62.61 | v44.42,47.12 44.42,47.04 43.48,46.1 R2.2 39.96,44.87 40.24,44.59 40.34,44.59
  Bottom 0.61: C16.1 C17.1 47.23,43.09 v47.57,42.75 | IC8.6 IC8.7 IC8.8
  Bottom 0.813: 41.62,40.34 C8.1 | v41.55,40.34 39.65,40.34 39.65,40.28 39.66,40.28 | 43.64,40.4 47.04,40.4 | 47.04,40.4 C15.1 47.57,40.66 47.17,41.07 47.17,42.34 v47.57,42.75 | X2.2 3.89,72.24 R1.2 7.86,74 8.51,74.65 12.32,74.65 13.01,73.97 v13.01,69.01 | IC8.6 56.24,17.78 56.97,18.52 v57,20.57 | v52.88,36.55 51.33,36.55 50.39,37.49 50.39,39.57 49.55,40.41 47.06,40.41 47.04,40.4 | C13.1 23.82,40.32 21.95,42.19 13.97,42.19 13.23,42.93 v13.23,44.73
PIC32-PGC2  (via drill 0.3)
  Top 0.203: X5.23 43.79,82.71 43.79,80.57 43.38,80.16 40.34,80.16 39.93,79.76 39.93,66.75 39.52,66.34 17.78,66.34 17.37,65.94 17.37,49.94 v17.65,49.66 18.57,48.74 33.12,48.74 33.5,49.12 33.5,50.16 33.93,50.6 v35.64,50.6 35.87,50.37 35.87,49.38 36.55,48.69 IC4.26
  Bottom 0.203: 69.37,56.82 67.08,56.82 66.7,56.44 66.7,53.47 66.37,53.14 60.48,53.14 60.22,53.39 60.22,53.75 59.94,54.03 36.09,54.03 35.64,53.57 v35.64,50.6 | 3.35,49.71 1.7,49.71 1.32,50.09 1.32,79.32 1.83,79.83 X2.5
  Bottom 0.229: IC7.4 71.82,57.64 70.99,56.82 69.37,56.82
  Bottom 0.254: 3.35,49.71 3.71,49.35 17.35,49.35 v17.65,49.66
PIC32-PGD2  (via drill 0.3)
  Top 0.203: 35.87,48.29 35.73,48.29 35.13,48.9 v35.13,49.68 | 35.87,48.29 IC4.27 | R15.2 60.98,53.85 v60.88,53.95 | X5.22 41.98,85.27 42.57,84.68 42.57,80.97 42.16,80.57 39.93,80.57 39.52,80.16 39.52,67.16 39.12,66.75 17.37,66.75 16.97,66.34 16.97,49.23 17.63,48.56 v17.75,48.56 18.03,48.29 35.87,48.29
  Top 0.254: v2.49,50.37 2.52,49.28 v2.92,48.87
  Bottom 0.203: 69.34,57.81 66.12,57.81 65.63,57.33 65.63,55.09 65.13,54.59 60.88,54.59 | 60.88,54.59 35.87,54.59 35.18,53.9 35.18,51.51 34.82,51.16 34.82,49.99 v35.13,49.68 | 60.88,54.59 v60.88,53.95 | X2.4 1.93,77.29 1.73,77.09 1.73,50.7 2.06,50.37 v2.49,50.37
  Bottom 0.229: IC7.6 71.29,58.64 70.46,57.81 69.34,57.81
  Bottom 0.254: v2.92,48.87 17.45,48.87 v17.75,48.56
RA6
  Top 0.203: IC4.91 65.04,45.09 65.33,44.81 65.33,14.53 64.72,13.92 54.15,13.92 53.54,13.31 53.54,8.79 52.73,7.98 52.73,5.97 X3.31
RA7
  Top 0.203: IC4.92 65.46,45.49 65.73,45.21 65.73,14.12 65.13,13.51 54.56,13.51 53.95,12.9 53.95,7.29 X3.32
RA9
  Top 0.203: IC4.28 17.13,47.89 16.56,48.46 16.56,66.75 16.97,67.16 38.71,67.16 39.12,67.56 39.12,80.57 39.52,80.97 40.95,80.97 41.35,81.38 41.35,82.65 X5.21
RA10
  Top 0.203: IC4.29 16.72,47.49 16.15,48.06 16.15,67.16 16.56,67.56 38.3,67.56 38.71,67.97 38.71,80.97 39.12,81.38 39.73,81.38 40.13,81.79 40.13,84.84 39.7,85.27 X5.20
RB4
  Top 0.203: IC4.21 41,71.88 41.55,72.44 47.24,72.44 47.65,72.85 47.65,80.16 47.24,80.57 45.41,80.57 45.01,80.97 45.01,84.84 44.58,85.27 X5.24
RB5
  Top 0.203: IC4.20 41.4,50.5 41.4,50.49 41.4,71.48 41.96,72.03 47.65,72.03 48.06,72.44 48.06,80.57 47.65,80.97 46.84,80.97 46.43,81.38 46.43,82.65 X5.25
RB8
  Top 0.203: IC4.32 15.48,46.29 14.94,46.84 14.94,67.97 15.34,68.38 37.49,68.38 37.9,68.78 37.9,81.9 X5.19
RB9
  Top 0.203: IC4.33 15.07,45.89 14.53,46.43 14.53,68.38 14.94,68.78 37.08,68.78 37.49,69.19 37.49,84.84 37.06,85.27 X5.18
RB10
  Top 0.203: IC4.34 14.66,45.49 14.12,46.02 14.12,68.78 14.53,69.19 36.68,69.19 37.08,69.6 37.08,81.84 X5.17
RB11
  Top 0.203: IC4.35 14.24,45.09 13.72,45.62 13.72,69.19 14.12,69.6 36.27,69.6 36.68,70 36.68,80.97 36.27,81.38 35.26,81.38 34.85,81.79 34.85,84.84 34.41,85.27 X5.16
RB12
  Top 0.203: IC4.41 11.56,42.69 11.07,43.18 11.07,71.42 11.48,71.83 27.74,71.83 28.14,72.24 28.14,81.18 28.55,81.58 29.36,81.58 29.77,81.99 29.77,84.84 29.36,85.24 28.6,85.24 X5.12
RB13
  Top 0.203: IC4.42 11.15,42.29 10.67,42.77 10.67,71.83 11.07,72.24 27.33,72.24 27.74,72.64 27.74,81.9 X5.11
RB14
  Top 0.203: IC4.43 10.74,41.89 10.26,42.37 10.26,72.24 10.67,72.64 26.92,72.64 27.33,73.05 27.33,83.97 X5.10
RB15
  Top 0.203: IC4.44 10.32,41.49 9.86,41.96 9.86,72.64 10.26,73.05 26.52,73.05 26.92,73.46 26.92,81.84 X5.9
RC1
  Top 0.203: X5.36 59.71,85.27 60.45,84.53 60.45,81.79 60.25,81.58 59.84,81.58 59.44,81.18 59.44,62.28 59.03,61.87 48.06,61.87 47.45,61.87 47,61.42 IC4.6
RC2
  Top 0.203: X5.35 59.03,82.71 59.03,62.69 58.62,62.28 47.68,62.28 47.04,62.28 46.6,61.84 IC4.7
RC3
  Top 0.203: X5.34 57.3,85.27 57.81,84.76 57.81,81.79 58.01,81.58 58.22,81.58 58.62,81.18 58.62,63.09 58.22,62.69 46.81,62.69 46.2,62.07 IC4.8
RD1
  Top 0.203: 42.32,19.61 42.27,19.61 | X3.18 35.33,8.13 35.33,19.02 35.92,19.61 42.32,19.61 | IC4.76 59.05,39.09 59.64,38.51 59.64,20.22 59.03,19.61 42.32,19.61
RD2
  Top 0.203: X3.19 37.47,6 37.49,6.02 37.49,7.92 38.3,8.74 38.3,18.59 38.91,19.2 59.44,19.2 60.05,19.81 60.05,38.91 59.47,39.49 IC4.77
RD3
  Top 0.203: IC4.78 59.88,39.89 60.45,39.32 60.45,19.41 59.84,18.8 39.32,18.8 38.73,18.21 X3.20
RD4
  Top 0.203: IC4.81 61.12,41.09 61.67,40.54 61.67,18.19 61.06,17.58 43.38,17.58 42.57,16.76 42.57,5.97 X3.23
RD5
  Top 0.203: IC4.82 61.53,41.49 62.08,40.95 62.08,17.78 61.47,17.17 43.79,17.17 42.98,16.36 42.98,8.1 X3.24
RD6
  Top 0.203: X3.25 45.21,5.87 45.21,7.95 45.82,8.56 45.82,16.15 46.43,16.76 61.87,16.76 62.48,17.37 62.48,41.35 61.94,41.89 IC4.83
RD7
  Top 0.203: IC4.84 62.36,42.29 62.89,41.76 62.89,16.97 62.28,16.36 46.84,16.36 46.23,15.75 46.23,7.39 X3.26
RD8
  Top 0.203: X3.13 29.87,5.97 29.87,7.75 30.56,8.43 30.56,22.17 31.11,22.73 48.31,22.73 49.71,24.13 49.71,30.2 46.2,33.71 IC4.68
RD9
  Top 0.203: X3.14 31.11,21.79 31.55,22.23 48.72,22.23 50.34,23.85 50.34,30.48 46.6,34.23 IC4.69
RD11
  Top 0.203: IC4.71 47.4,35.31 52.02,30.68 52.02,23.9 49.25,21.13 35.13,21.13 34.44,20.45 34.44,8.06 X3.16
RD12
  Top 0.203: X3.21 40.06,5.94 40.06,7.75 39.14,8.66 39.14,17.78 39.75,18.39 60.25,18.39 60.86,19 60.86,39.73 60.29,40.29 IC4.79
RD13
  Top 0.203: X3.22 42.16,8.16 42.16,17.17 42.98,17.98 60.66,17.98 61.27,18.59 61.27,40.13 60.71,40.69 IC4.80
RD14
  Top 0.203: IC4.47 9.09,40.29 8.64,40.74 8.64,73.25 9.04,73.66 26.11,73.66 26.52,74.07 26.52,81.08 26.01,81.58 25.35,81.58 24.89,82.04 24.89,84.84 24.46,85.27 X5.8
RD15
  Top 0.203: IC4.48 8.67,39.89 8.23,40.34 8.23,73.66 8.64,74.07 25.7,74.07 26.11,74.47 26.11,80.75 25.68,81.18 23.88,81.18 23.49,81.56 X5.7
RE0
  Top 0.203: IC4.93 65.87,45.89 66.14,45.62 66.14,13.72 65.53,13.11 54.97,13.11 54.36,12.5 54.36,8.89 55.17,8.08 55.17,6.07 X3.33
RE1
  Top 0.203: IC4.94 66.28,46.29 66.55,46.02 66.55,13.31 65.94,12.7 58.01,12.7 57.4,12.09 57.4,8.16 X3.34
RE2
  Top 0.203: IC4.98 67.93,47.89 68.17,47.65 68.17,11.68 67.56,11.07 62.28,11.07 61.67,10.46 61.67,7.35 X3.38
RE3
  Top 0.203: IC4.99 68.35,48.29 68.58,48.06 68.58,11.28 67.97,10.67 62.69,10.67 62.08,10.06 62.08,8.79 62.89,7.98 62.89,5.97 X3.39
RE4
  Top 0.203: IC4.100 68.76,48.69 68.99,48.46 68.99,10.87 68.38,10.26 63.09,10.26 62.48,9.65 62.48,8.99 62.81,8.66 63.91,8.66 64.14,8.43 X3.40
RE5
  Top 0.203: X5.39 64.31,82.55 64.31,80.77 63.91,80.37 61.06,80.37 60.66,79.96 60.66,61.06 60.25,60.66 49.89,60.66 49.48,60.25 49.48,58.62 49.28,58.42 48.46,58.42 48.2,58.15 IC4.3
RE6
  Top 0.203: X5.38 61.85,85.27 63.09,84.02 63.09,81.18 62.69,80.77 60.66,80.77 60.25,80.37 60.25,61.47 59.84,61.06 49.48,61.06 49.07,60.66 49.07,59.03 48.87,58.83 48.06,58.83 47.8,58.57 IC4.4
RE7
  Top 0.203: X5.37 61.67,82.65 61.67,81.58 61.27,81.18 60.25,81.18 59.84,80.77 59.84,61.87 59.44,61.47 49.07,61.47 48.67,61.06 48.67,59.44 48.46,59.23 47.62,59.23 47.4,59 IC4.5
RE9
  Top 0.203: X5.26 47.62,84 47.62,82.02 48.46,81.18 48.46,72.03 48.06,71.63 42.32,71.63 41.8,71.11 IC4.19
RF0
  Top 0.203: X3.27 47.62,6 47.62,8.2 48.06,8.64 48.87,8.64 49.28,9.04 49.28,14.73 50.09,15.54 63.09,15.54 63.7,16.15 63.7,43.18 63.39,43.49 IC4.87
RF1
  Top 0.203: IC4.88 63.8,43.89 64.11,43.59 64.11,15.75 63.5,15.14 50.49,15.14 49.68,14.33 49.68,8.06 X3.28
RF3  (via drill 0.3)
  Top 0.203: v27.05,64.57 26.67,64.19 v18.11,64.19 | IC4.51 39.4,36.48 38.86,35.94 v36.09,35.94 | X3.4 19.18,8.04 19.18,27.46 19.81,28.09 31.14,28.09 31.55,28.5 v31.55,31.57
  Top 0.254: v6.2,63.7 6.73,63.7 6.99,63.45 6.99,45.14 6.5,44.65 v6.5,44.5
  Bottom 0.203: v31.55,31.57 31.55,35.87
  Bottom 0.254: 35.48,35.94 34.24,35.94 | 35.48,35.94 v36.09,35.94 36.14,35.99 36.14,38.76 35.41,39.5 23.32,39.5 21.61,41.2 7.14,41.2 6.5,41.83 v6.5,44.5 | IC3.1 32.74,69.19 32.38,68.83 32.38,65.91 31.04,64.57 v27.05,64.57 | 35.48,35.94 31.62,35.94 31.55,35.87 | v18.11,64.19 9.2,64.19 7.34,64.19 6.86,63.7 v6.2,63.7
RF4  (via drill 0.3)
  Top 0.203: X5.6 20.98,85.24 21.84,85.24 22.25,84.84 22.25,81.18 22.66,80.77 25.27,80.77 25.7,80.34 25.7,74.88 25.3,74.47 8.23,74.47 7.82,74.07 7.82,39.75 v8,39.57 8.08,39.49 IC4.49 | LED2.A 6.4,40.23 v6.4,38.91
  Top 0.254: v70.08,87.78 69.32,87.78 68.73,87.38 21.29,87.38 20.95,87.04 X5.6
  Bottom 0.203: v6.4,38.91 7.24,38.91 v8,39.57
  Bottom 0.254: v70.08,87.78 69.29,87.17 69.29,86.51 69.32,77.06 67.28,75.03 67.28,67.26 65.3,65.28 IC5.12
RF5  (via drill 0.3)
  Top 0.203: 7.42,42.49 7.42,74.47 7.82,74.88 24.89,74.88 25.3,75.29 25.3,79.96 24.89,80.37 22.25,80.37 21.84,80.77 21.84,81.84 X5.5 20.07,82.73 19.68,83.11 19.68,84 | 7.42,42.49 LED4.A | IC4.50 8.61,39.09 8.23,38.71 7.59,38.71 7.34,38.96 7.34,40.56 7.42,40.64 7.42,42.49
  Top 0.254: 19.68,84 19.68,86.97 20.8,88.09 v68.1,88.09
  Bottom 0.254: IC5.11 65.46,66.55 66.52,67.61 66.52,75.36 68.68,77.52 68.68,88.21 v68.1,88.09
RF12
  Top 0.203: IC4.40 11.98,43.09 11.48,43.59 11.48,71.02 11.89,71.42 28.14,71.42 28.55,71.83 28.55,80.77 28.96,81.18 30.61,81.18 31.01,81.58 31.01,82.63 X5.13
RF13
  Top 0.203: IC4.39 12.39,43.49 11.89,43.99 11.89,70.61 12.29,71.02 28.55,71.02 28.96,71.42 28.96,80.37 29.36,80.77 32,80.77 32.41,81.18 32.41,84.84 32,85.24 31.14,85.24 X5.14
RG0
  Top 0.203: IC4.90 64.63,44.69 64.92,44.4 64.92,14.94 64.31,14.33 51.31,14.33 50.49,13.51 50.49,8.21 X3.30
RG1
  Top 0.203: IC4.89 64.22,44.29 64.52,43.99 64.52,15.34 63.91,14.73 50.9,14.73 50.09,13.92 50.09,6.25 51.43,4.91 X3.29
RG9
  Top 0.203: 43.03,64.06 43.03,59.69 43.8,58.92 IC4.14 | 43.03,64.06 43.03,64.14 | 43.03,64.06 43.03,70.05 43.38,70.41 49.28,70.41 49.68,70.81 49.68,80.77 50.09,81.18 51.1,81.18 51.51,81.58 51.51,82.65 X5.29
RG13
  Top 0.203: IC4.97 67.52,47.49 67.77,47.24 67.77,12.09 67.16,11.48 61.87,11.48 61.27,10.87 61.27,8.91 60.25,7.9 60.25,5.36 60.88,4.73 X3.37
RG15  (via drill 0.3)
  Top 0.203: X5.40 65.84,83.56 65.84,80.16 | 65.84,80.16 v65.84,77.37 | 65.84,80.16 65.63,79.96 61.47,79.96 61.06,79.55 61.06,60.66 60.66,60.25 50.29,60.25 49.89,59.84 49.89,58.22 49.68,58.01 49.28,58.01 49,57.73 IC4.1
  Bottom 0.254: IC2.1 52.25,75.59 54.1,77.44 65.76,77.44 v65.84,77.37
SCK1  (via drill 0.3)
  Top 0.203: X3.15 32.38,6 32.38,7.75 31.62,8.51 31.62,20.83 | IC4.70 47,34.74 51.18,30.56 51.18,23.75 49.1,21.67 32.13,21.67 31.62,21.16 31.62,20.83 | v71.63,46.84 71.22,46.84 71.06,46.67 | 71.06,46.67 71.02,46.63 | 31.62,20.83 v32.41,20.83 | v69.83,20.37 71.3,20.37 71.63,20.7 71.63,22.25 71.22,22.66 71.22,24.18 70.81,24.59 70.81,46.43 71.06,46.67
  Bottom 0.203: IC1.8 93.55,33.66 93.37,33.83 93.37,47.04 93.17,47.24 72.03,47.24 v71.63,46.84 | v32.41,20.83 51.51,20.83 51.71,21.03 51.71,21.44 51.92,21.64 68.38,21.64 68.58,21.44 68.58,20.83 69.04,20.37 v69.83,20.37
SCK2
  Top 0.203: X5.32 55.37,83.87 55.37,80.97 55.78,80.57 57.4,80.57 57.81,80.16 57.81,63.91 57.4,63.5 45.85,63.5 45.4,63.05 IC4.10
  Bottom 0.254: X5.32 55.24,84 55.24,79.76 54.08,78.59 31.77,78.59 30.94,77.75 30.94,73.48 30.5,73.05 IC2.6 27.61,73.05 27.1,72.54 27.1,70.99 27.61,70.48 30.45,70.48 30.91,70.03 30.91,67.08 30.48,66.65 IC3.6
SCL1
  Top 0.203: X3.11 27.3,6 27.3,23.34 27.86,23.9 37.49,23.9 47.57,23.9 48.46,24.79 48.46,29.59 45.4,32.66 IC4.66
SCL2
  Top 0.203: X3.7 22.2,6.02 22.2,7.8 22.96,8.56 22.96,25.48 23.57,26.09 34.34,26.09 34.75,26.49 34.75,31.22 35.28,31.75 41.73,31.75 42.2,32.21 IC4.58
SDA1
  Top 0.203: IC4.67 45.8,33.2 49.12,29.87 49.12,24.49 47.93,23.29 38.12,23.29 28.22,23.29 27.81,22.89 27.81,8.03 27.84,8 X3.12
SDA2
  Top 0.203: X3.8 23.49,25.01 24,25.53 34.62,25.53 35.23,26.14 35.23,30.84 35.64,31.24 42.24,31.24 42.6,31.6 IC4.59
SDI1  (via drill 0.3)
  Top 0.203: X5.33 56.39,82.61 56.39,81.38 56.79,80.97 57.81,80.97 58.22,80.57 58.22,63.5 57.81,63.09 46.23,63.09 45.8,62.66 IC4.9 45.8,47.65 v45.64,47.37 | v59.11,49.38 52.22,49.38 v51.71,49.89
  Bottom 0.203: IC1.6 94.46,36.2 94.18,36.47 94.18,47.85 93.98,48.06 71.02,48.06 70.81,48.26 59.33,48.26 59.11,48.49 v59.11,49.38 | v51.71,49.89 51.21,49.38 46.3,49.38
  Bottom 0.254: 46.3,49.38 45.8,48.87 45.8,47.85 45.64,47.7 v45.64,47.37
SDI2  (via drill 0.3)
  Top 0.203: X5.31 v53.97,75.87 53.99,75.89 57,75.89 57.4,75.49 57.4,64.31 57,63.91 45.41,63.91 45,63.49 IC4.11
  Bottom 0.254: v53.97,75.87 52.42,74.32 IC2.2 35.71,74.32 36.17,73.86 36.17,68.53 35.56,67.92 IC3.2
SDO1  (via drill 0.3)
  Top 0.203: X3.17 34.92,6 34.92,19.94 35.53,20.55 49.81,20.55 v50.91,21.65 52.78,23.52 52.78,30.68 47.8,35.67 IC4.72 | v70.81,22.05 70.81,23.82 70.41,24.23 70.41,47.24 v70.61,47.45
  Bottom 0.203: 96.47,34.92 94.13,34.92 93.78,35.28 93.78,47.45 93.57,47.65 70.81,47.65 v70.61,47.45 | v70.81,22.05 70.81,21.23 70.61,21.03 69.19,21.03 68.99,21.23 68.99,21.84 68.78,22.05 51.31,22.05 v50.91,21.65
  Bottom 0.406: 96.47,34.92 IC1.7
SDO2  (via drill 0.3)
  Top 0.203: X5.30 52.68,84.02 v52.68,77.47 52.53,77.32 52.53,75.49 52.93,75.08 56.59,75.08 57,74.68 57,64.72 56.59,64.31 45.03,64.31 44.6,63.88 IC4.12
  Bottom 0.254: 30.79,71.78 IC2.5 | IC3.5 30.81,65.38 31.7,66.27 31.7,70.87 30.79,71.78 | 30.79,71.78 31.42,72.42 31.42,77.37 32.16,78.11 52.05,78.11 v52.68,77.47
TCK  (via drill 0.3)
  Top 0.203: 34.42,43.89 IC4.38 | 34.42,43.89 v34.42,44.45 | 34.42,43.89 12.8,43.89 12.29,44.4 12.29,70.21 12.7,70.61 28.96,70.61 29.36,71.02 29.36,79.96 29.77,80.37 33.22,80.37 33.63,80.77 33.63,82.71 X5.15 | R14.2 83.06,52.78 82.8,52.53 82.8,52.32 82.42,51.94 v82.3,51.94
  Bottom 0.203: IC7.49 82.21,52.03 v82.3,51.94 82.07,51.71 68.5,51.71 68.02,52.2 58.7,52.2 58.19,52.7 43.87,52.7 43.84,52.68 37.67,52.68 36.47,51.49 36.47,50.29 36.27,50.09 36.27,44.86 35.87,44.45 v34.42,44.45
TDI  (via drill 0.3)
  Top 0.203: X3.9 24.74,6.02 24.74,7.85 24.54,8.05 24.51,8.05 24.03,8.53 24.03,24.69 24.43,25.09 25.43,25.09 | v69.6,52.83 69.47,52.7 69.47,23.27 v69.65,23.09 | 25.43,25.09 35.26,25.09 35.79,25.63 35.79,30.33 36.12,30.66 42.62,30.66 43,31.03 IC4.60 | v25.09,24.27 25.09,25.09 25.43,25.09
  Bottom 0.203: IC7.51 81.21,52.94 80.95,52.68 69.75,52.68 v69.6,52.83 | v25.09,24.27 25.09,24.71 25.48,25.09 35.05,25.09 35.46,24.69 35.46,23.47 35.87,23.06 69.62,23.06 v69.65,23.09
TDO  (via drill 0.3)
  Top 0.203: v69.67,21.87 69.67,21.95 70.41,22.68 70.41,23.55 69.9,24.05 69.9,50.19 v70.21,50.49 | X3.10 26.82,8.06 26.82,23.65 27.56,24.38 | 27.56,24.38 35.99,24.38 36.32,24.71 36.32,29.84 36.63,30.15 43.08,30.15 43.4,30.47 43.4,31.48 | 27.56,24.38 26.39,24.38 v26.29,24.28 | 43.4,31.48 IC4.61 | 43.4,31.48 43.38,31.47
  Bottom 0.203: v70.21,50.49 70.46,50.75 86.59,50.75 87.07,51.23 87.07,56.59 86.52,57.14 IC7.46 | v69.67,21.87 68.89,22.66 35.43,22.66 34.98,23.11 34.98,23.98 34.27,24.69 26.7,24.69 v26.29,24.28
TMS  (via drill 0.3)
  Top 0.203: X5.28 49.66,85.27 50.09,84.84 50.09,81.99 49.28,81.18 49.28,71.22 48.87,70.81 42.98,70.81 42.6,70.43 42.6,57.53 43.18,56.95 43.18,53.29 v43.16,53.39 42.6,52.7 IC4.17
  Bottom 0.203: IC7.50 81.71,52.58 81.31,52.17 68.81,52.17 68.3,52.68 59.08,52.68 58.52,53.24 v43.16,53.39
TPIN+  (via drill 0.6)
  Top 0.61: X9.4 89.51,18.85 90.47,19.81 93.22,19.81 94.03,20.62 v94.03,25.2
  Bottom 0.61: R7.1 98.82,22.76 94.94,22.76 94.03,23.67 v94.03,25.2 94.03,26.7 94.64,27.3 IC1.13
TPIN-
  Bottom 0.61: 92.05,19.53 92.05,26.19 94.44,28.57 IC1.12 | X9.6 92.05,19.53 | R8.1 92.58,20.07 92.05,19.53
TPOUT+  (via drill 0.6)
  Top 0.61: R5.1 81.33,22.05 81.86,21.51 81.86,19.28 X9.1 85.47,15.67 85.47,20.75 86.49,21.77 v89.92,21.77
  Bottom 0.61: IC1.17 88.65,28.57 89.92,27.3 v89.92,21.77
TPOUT-
  Top 0.61: R6.1 79.88,18.92 80.75,18.06 80.75,15.93 81.48,15.19 83.62,15.19 84.91,13.89 87.81,13.89 88.24,14.33 X9.3
  Bottom 0.61: IC1.16 88.19,27.3 88.8,26.7 88.8,20.02 88.24,19.46 X9.3
U1RX  (via drill 0.3)
  Top 0.203: X3.5 19.68,6 19.68,27.05 20.17,27.53 31.55,27.53 32,27.99 32,30.48 v32.26,30.73 | IC4.52 39.8,36.01 39.8,35.23 39.52,34.95 v36.88,34.95
  Bottom 0.203: v36.88,34.95 32.82,34.95 v32.33,34.47 32.26,34.39 v32.26,30.73
U1TX  (via drill 0.3)
  Top 0.203: X3.6 20.22,8 20.22,26.44 20.8,27.03 32.16,27.03 32.56,27.43 32.56,29.49 33.02,29.95 v33.02,31.65 | IC4.53 40.2,34.89 39.75,34.44 38.05,34.44 37.82,34.21 33.66,34.21 v33.02,33.58
  Bottom 0.203: v33.02,31.65 v33.02,33.58
USBDM
  Top 0.203: X1.2 13.6,32.5 13.95,32.84 41,32.84 41.4,33.24 IC4.56
USBDP
  Top 0.203: X1.3 11.6,30.82 11.94,30.48 16.1,30.48 16.43,30.81 16.43,32.03 16.71,32.31 41.43,32.31 41.8,32.68 IC4.57
VBUS  (via drill 0.3)
  Top 0.203: v38.63,33.68 38.84,33.68 39.06,33.91 40.31,33.91 40.6,34.2 IC4.54
  Top 0.406: X1.1 28.83,29.23 v29.49,29.23
  Bottom 0.406: v38.63,33.68 35.38,33.68 34.9,33.2 34.9,29.59 34.54,29.23 v29.49,29.23
  Bottom 0.813: JP4.3 13.97,26.01 13.6,26.38 X1.1
VDDCORE  (via drill 0.3)
  Top 0.203: IC4.85 49.58,42.69 49.51,42.62 49.51,42.11 49.48,42.09
  Top 0.406: v48.46,41.96 49.35,41.96 49.48,42.09
  Bottom 0.813: v48.46,41.96 50.72,41.96 C7.+

## Text on the board
tNames: RS-232 | ICSP | ANALOG | USB | 25MHz | 32.768KHz | 24MHz | DC 6.5~9V | LAN 10MBPS